# Altium PCB OUR_CIU.PcbDoc (part 2 of 2)
Units mil, origin at the board's own origin, x right, y up, seen from the top; angles counter-clockwise.
Board outline 2638.36 x 2031.63 mil, 4 copper layers (Signal, Top Ground, Power, Bottom Ground), stack 23.756 mil thick; 81 components, 38 nets, 261 pads, 83 vias.
Unrouted connection lines stored in the file: 31.
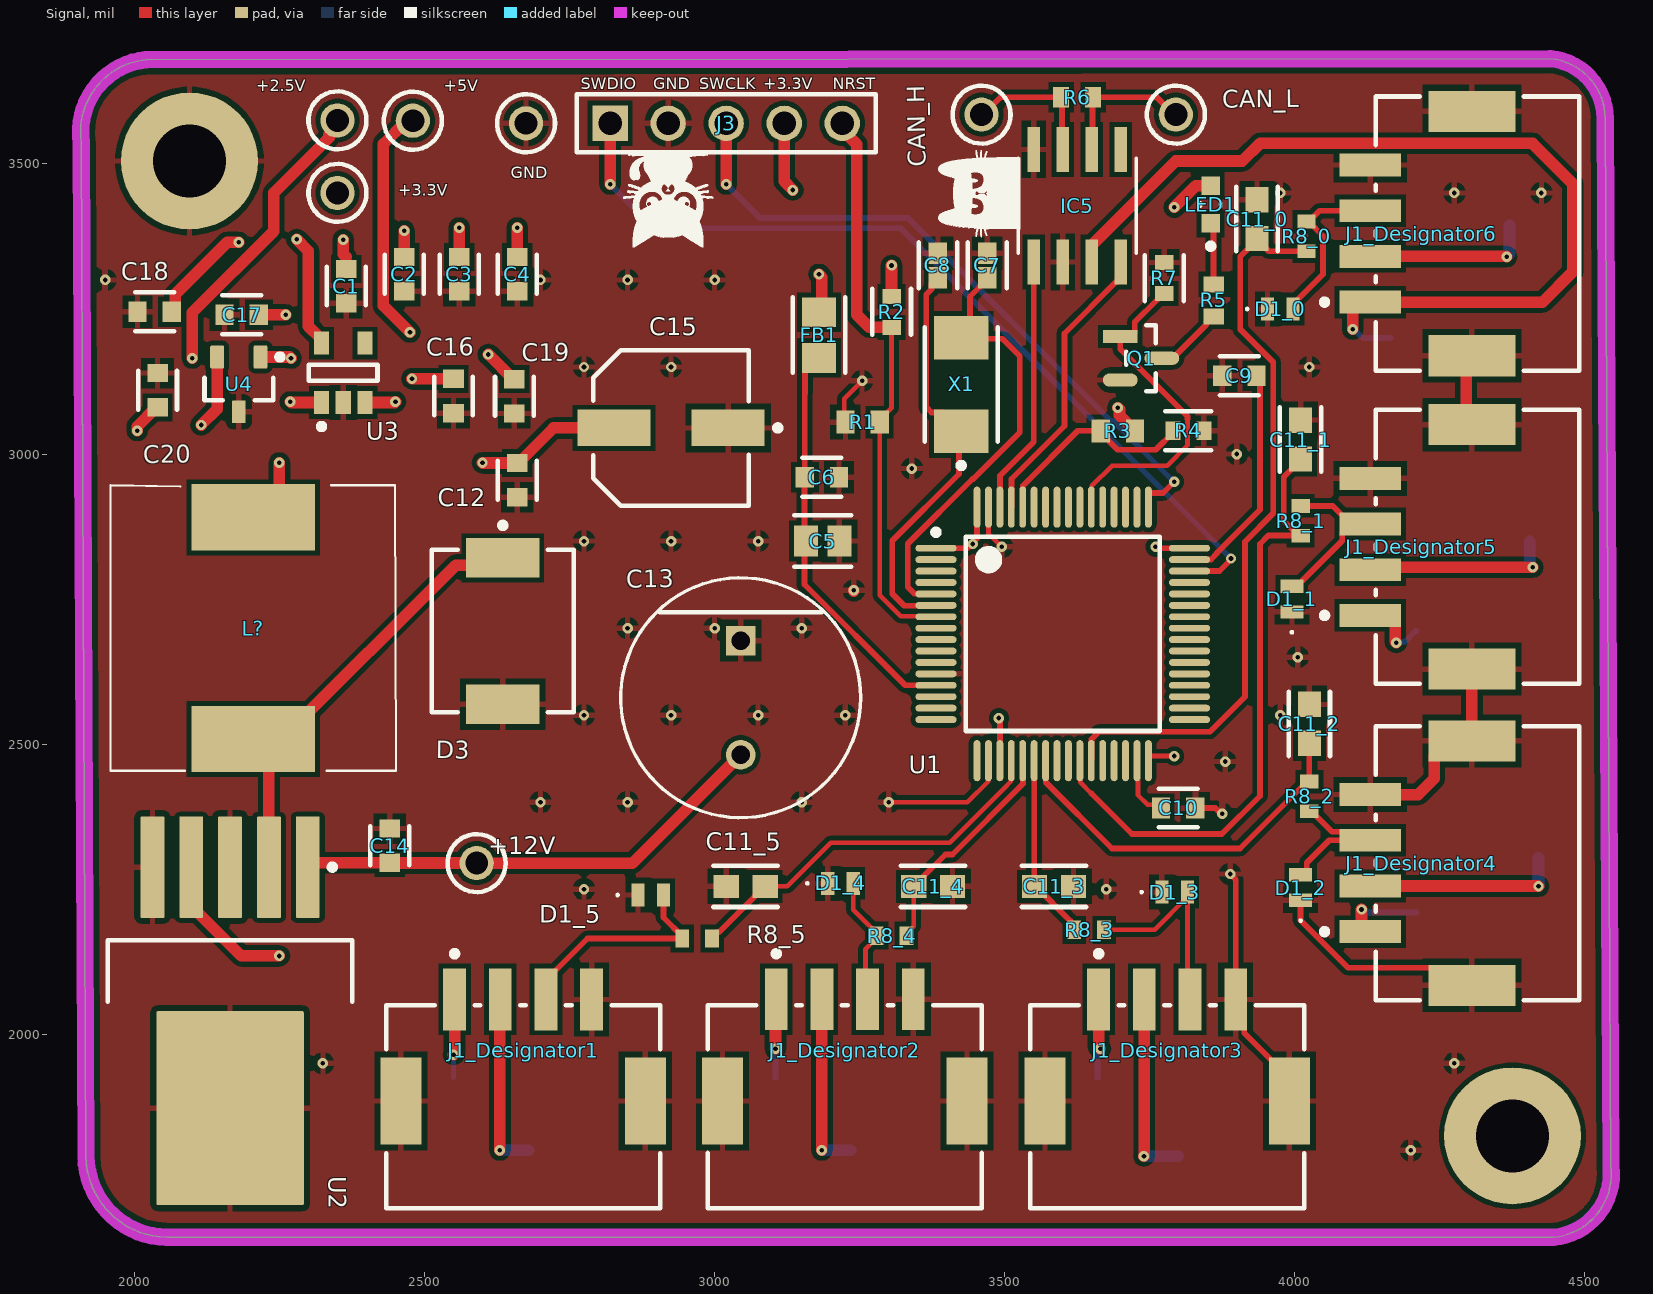
[diagram p0: Signal view]

## Via types
v1: diameter 18, hole 8, Signal to Bottom Ground, 83 vias

## Nets (pads, with @x,y where several pads share a name; then routed paths per layer and width w, separated by ;. In a path a pad name is that pad's centre, name@x,y a point inside that pad or via, vN(x,y) a via of type N, cw(c..) or ccw(c..) an arc to the next point about the centre after c; other vN are vias at no path point) (continued)
GND: (continued)
  Signal w10: U1.12 U1.12@3381.84,2620.76 ; C10.1 3862.84,2390 3872.84,2380 v1(3875,2380) ; v1(3888.53,2276.26) 3898.11,2266.68 J1_Designator3.4 3912.8,2045.35 3912.8,2002.05 3990.63,1924.21 J1_Designator3.5 ; D1_2.1 4010,2196.4 4091.6,2114.8 4280.2,2114.8 4310,2085 4309.37,2084.37 J1_Designator4.6
  Signal w20: v1@3239.91,2763.85 3239.91,2764.91 v1(3240,2765) ; J1_Designator4.4 4212.64,2413.11 4240.35,2440.83 4240.35,2480.2 4265.79,2505.63 J1_Designator4.5 J1_Designator5.6 J1_Designator5.6 ; J1_Designator6.6@4295.16,3169.37 4295.16,3060.63 J1_Designator5.5
  Top Ground w10: v1(3875,2380) 3875,2377.84 3888.53,2364.31 v1(3888.53,2276.26)
  other v1: 4200,1800 2325,1950 4275,1950 2775,2250 3675,2250 2700,2400 2850,2400 3150,2400 3880,2470 2775,2550 2925,2550 3075,2550 3225,2550 3975,2550 4005,2650 2850,2700 3000,2700 3150,2700 2775,2850 2925,2850 3075,2850 3340,2975 3900,3000 2775,3150 2925,3150 4025,3150 1950,3300 2700,3300 2850,3300 3000,3300 3975,3450 4275,3450 4425,3450
in_UNFLT_0: D1_0.2 J1_Designator6.3 R8_0.1 | length 335.1
  Signal w10: D1_0.2 3997.05,3258.27 4048.75,3309.97 4048.75,3375.78 R8_0.1@4023.94,3400.59 ; R8_0.1 R8_0.1@4023.94,3400.59 ; J1_Designator6.3@4165,3419.37 4042.72,3419.37 R8_0.1@4023.94,3400.59
in_UNFLT_1: D1_1.2 J1_Designator5.3 R8_1.1 | length 287.1
  Signal w10: D1_1.2 4003.27,2772.05 4081.85,2850.63 4081.85,2864.65 4096.57,2879.37 J1_Designator5.3@4129.96,2879.37 ; R8_1.1 4065.28,2910.59 J1_Designator5.3@4096.5,2879.37
in_UNFLT_2: D1_2.2 J1_Designator4.3 R8_2.1 | length 268.1
  Signal w10: D1_2.2@4010,2273.53 4012.68,2273.53 4020.56,2281.42 4020.56,2295.56 4059.37,2334.37 J1_Designator4.3@4118.92,2334.37 ; R8_2.1 4028.94,2384.41 4064.29,2349.06 4104.23,2349.06 J1_Designator4.3@4118.92,2334.37 ; J1_Designator4.3 J1_Designator4.3@4118.92,2334.37
in_UNFLT_3: D1_3.2 J1_Designator3.3 R8_3.1 | length 362.4
  Signal w8: R8_3.1 3758.27,2180 3815,2236.73 D1_3.2 3815,2064.41 J1_Designator3.3
in_UNFLT_4: D1_4.2 J1_Designator2.3 R8_4.1 | length 226.1
  Signal w8: D1_4.2 3239.09,2214.25 3279.41,2173.94 R8_4.1 3279.41,2166.06 3260,2146.65 3260,2063.94 J1_Designator2.3
in_UNFLT_5: D1_5.2 J1_Designator1.3 R8_5.1 | length 386.5
  Signal w10: J1_Designator1.3 2709.37,2093.5 2780.87,2165 R8_5.1 2944.41,2168.94 2912.05,2201.3 D1_5.2
NetC5_2: C5.2 C6.2 FB1.1 U1.13 | length 695
  Signal w10: C5.2@3155,2851.43 3155,2775 3328.58,2601.42 U1.13 ; C5.2@3155,2857.62 C6.2@3155,2960 ; C6.2 3155.47,3104.53 3155.78,3104.84 3155.78,3144.92 3176.47,3165.6 FB1.1
NetC7_1: C7.1 U1.5 X1.2 | length 746.7
  Signal w10: U1.5 3381.15,2759.24 3344.57,2759.24 3333.06,2770.75 3333.06,2845.47 3444.53,2956.94 3445.68,2956.94 3525.88,3037.14 3525.88,3169.12 3496.39,3198.61 3442.09,3198.61 3440,3200.71 3440,3271.38 3470,3301.38 C7.1
NetC8_1: C8.1 U1.6 X1.1 | length 717.1
  Signal w10: U1.6 3381.15,2738.87 3350.34,2738.87 3349.91,2738.43 3326.98,2738.43 3306.32,2759.1 3306.32,2850.58 3421.41,2965.67 X1.1@3421.41,3035.7 ; C8.1 3374.01,3292.73 3374.01,3284.14 3364.76,3274.88 3364.76,3080.76 3373.83,3071.69 3392.6,3071.69 X1.1
NetC9_2: C9.2 U1.47 | length 391.3
  Signal w10: U1.47 3818.85,2818.3 3855.43,2818.3 3866,2828.87 3866,2829.94 3940,2903.94 3940,3129.06 C9.2
NetC10_2: C10.2 U1.31 | length 108.7
  Signal w8: U1.31 3728.68,2470.77 3728.68,2438.54 3729.73,2437.49 3729.73,2412.22 3746.19,2395.76 3763.49,2395.76 C10.2
NetD3_1: D3.1 L?.1 U2.2 | length 790.1
  Signal w20: U2.2 2231.93,2482.13 L?.1 2254.21,2509.06 2553.72,2808.57 2615.57,2808.57 D3.1@2632,2825
NetLED1_1: LED1.1 R5.2 | length 107
  Signal w10: LED1.1 3860,3392.52 R5.2
NetQ1_3: Q1.3 R5.1 | length 122.6
  Signal w10: Q1.3 3789.46,3165 3847.28,3222.82 3847.28,3228.66 3856.06,3237.44 R5.1
NRST: J3.5 R1.2 R2.1 U1.7 | length 987.8
  Signal w8: R1.2 3284.53,2756.85 3321.12,2720.25 3380.77,2720.25 U1.7 ; R1.2@3284.53,3058.94 3305,3079.41 R2.1
  Signal w20: J3.5 3220,3558.9 3245,3533.9 3245,3240 3266.64,3218.36 R2.1
SWCLK: J3.3 U1.49 | length 1164.7
  Signal w10: U1.49 3747.64,2932.2 3748.47,2933.03 3773.03,2933.03 v1(3791.97,2951.97)
  Signal w20: v1(3020,3465) J3.3@3020,3569.03
  Bottom Ground w10: v1(3020,3465) 3077.96,3407.04 3332.96,3407.04 3684,3056 3687.94,3056 v1(3791.97,2951.97)
SWDIO: J3.1 U1.46 | length 1523.7
  Signal w10: U1.46 3818.85,2798.61 3870.37,2798.61 3890,2818.24 v1(3890,2820)
  Signal w20: v1(2820,3465) J3.1
  Bottom Ground w10: v1(2820,3465) 2895.96,3389.04 3320.96,3389.04 v1(3890,2820)
pads on no net: IC5.5 U1.2 U1.3 U1.4 U1.8 U1.9 U1.10 U1.11 U1.24 U1.25 U1.28 U1.29 U1.30 U1.33 U1.34 U1.35 U1.36 U1.37 U1.38 U1.39 U1.40 U1.41 U1.42 U1.43 U1.44 U1.45 U1.50 U1.51 U1.52 U1.53 U1.55 U1.56 U1.57 U1.58 U1.59 U3.4

## Polygon pours and split planes (outlines as drawn)
+5 on Power "+5_L03_P003" (solid, remove dead copper, pour order 3): 4210,2235 3905,1930 2370,1930 2210,2090 2210,3310 2675,3310 2675,2105 3875,2105 4050,2280 4050,3320 4210,3320
+2V5 on Power "+2V5_L03_P008" (solid, pour order 8): 4492.43,2205.62 3970.39,1699.93 2206.09,1699.93 1965,1990.55 1965,3195 2155,3195 2155,2085 2350,1890 3915,1890 4245.34,2220.34 4242.55,3410 4492.43,3410
D+3.3V on Power "D+3.3V_L03_P009" (solid, remove dead copper, pour order 9): 3881.47,2521.47 3815,2455 3499.14,2455 3115,2910.76 3115,3330 2170,3330 2145,3355 2145,3465 2171.11,3491.11 3883.89,3491.11
GND on Signal "GND_L01_P013" (solid, remove dead copper, pour order 13): 1816.79,1691.11 1821.08,1686.83 ccw(c1909.99,1775.73) 1909.99,1650 4435.13,1650 ccw(c4435.13,1739.16) 4498.18,1676.11 ccw(c4409.27,1765.02) 4535,1765.02 4535,3564.98 4535,3565.02 4535,3570.02 ccw(c4409.27,3570.02) 4499.96,3657.1 4499.62,3657.48 4495.33,3661.77 4493.89,3663.21 ccw(c4404.99,3574.31) 4411.22,3699.88 4409.99,3700.03 1909.99,3700.03 ccw(c1909.99,3574.31) 1821.08,3663.21 1816.79,3658.92 ccw(c1905.7,3570.02) 1779.97,3570.05 1779.97,3570.02 1779.97,1780.02 ccw(c1905.7,1780.02)
GND on Bottom Ground "GND_L04_P012" (solid, pour order 12): 1830.36,1679.64 1834.64,1675.36 ccw(c1920,1760.71) 1920,1640 4445.15,1640 ccw(c4445.15,1724.14) 4504.64,1664.64 ccw(c4419.29,1750) 4540,1750 4540,3650 ccw(c4419.29,3650) 4504.64,3735.36 4500.36,3739.64 ccw(c4415,3654.29) 4415,3775 1920,3775 ccw(c1920,3654.29) 1834.64,3739.64 1830.36,3735.36 ccw(c1915.71,3650) 1795,3650 1795,1765 ccw(c1915.71,1765)
GND on Top Ground "GND_L02_P011" (solid, pour order 11): 1895.41,1677.64 cw(c1980.77,1763) 1860.06,1763 1860.06,3648 cw(c1980.77,3648) 1895.41,3733.35 1899.7,3737.64 cw(c1985.06,3652.29) 2096.78,3698 4368.34,3698 cw(c4480.06,3652.29) 4565.41,3737.64 4569.7,3733.35 cw(c4484.35,3648) 4605.06,3648 4605.06,1748 cw(c4484.35,1748) 4569.7,1662.64 cw(c4510.21,1722.14) 4510.21,1638 1985.06,1638 cw(c1985.06,1758.71) 1899.7,1673.35

## Keep-outs
Keep-Out Layer:
  the board outline again, w30

## Silkscreen, mask and mechanical layers (free items; w line width, h text height)
Top Overlay:
  drawing of 2 lines, arcs and shapes, not listed
  text "SWDIO" at 2769,3629 h20
  text "GND" at 2894,3629 h20
  text "SWCLK" at 2974,3629 h20
  text "+3.3V" at 3084,3629 h20
  text "NRST" at 3204,3629 h20
Bottom Overlay:
  drawing of 22 lines, arcs and shapes, not listed
  text "Janice Zhang" at 2345,2305 h30
  text "Daniel Wang" at 2340,2250 h30
  text "Lily Lim" at 2340,2195 h30
Mechanical 1:
  the board outline again, w5.91